# Altium PCB antenna-db(1).PcbDoc
Units mm, origin at the board's own origin, x right, y up, seen from the top; angles counter-clockwise.
Board outline 93.98 x 93.98 mm, 4 copper layers (F.Cu, In1.Cu, In2.Cu, B.Cu); 80 components, 74 nets, 250 pads, 206 vias.
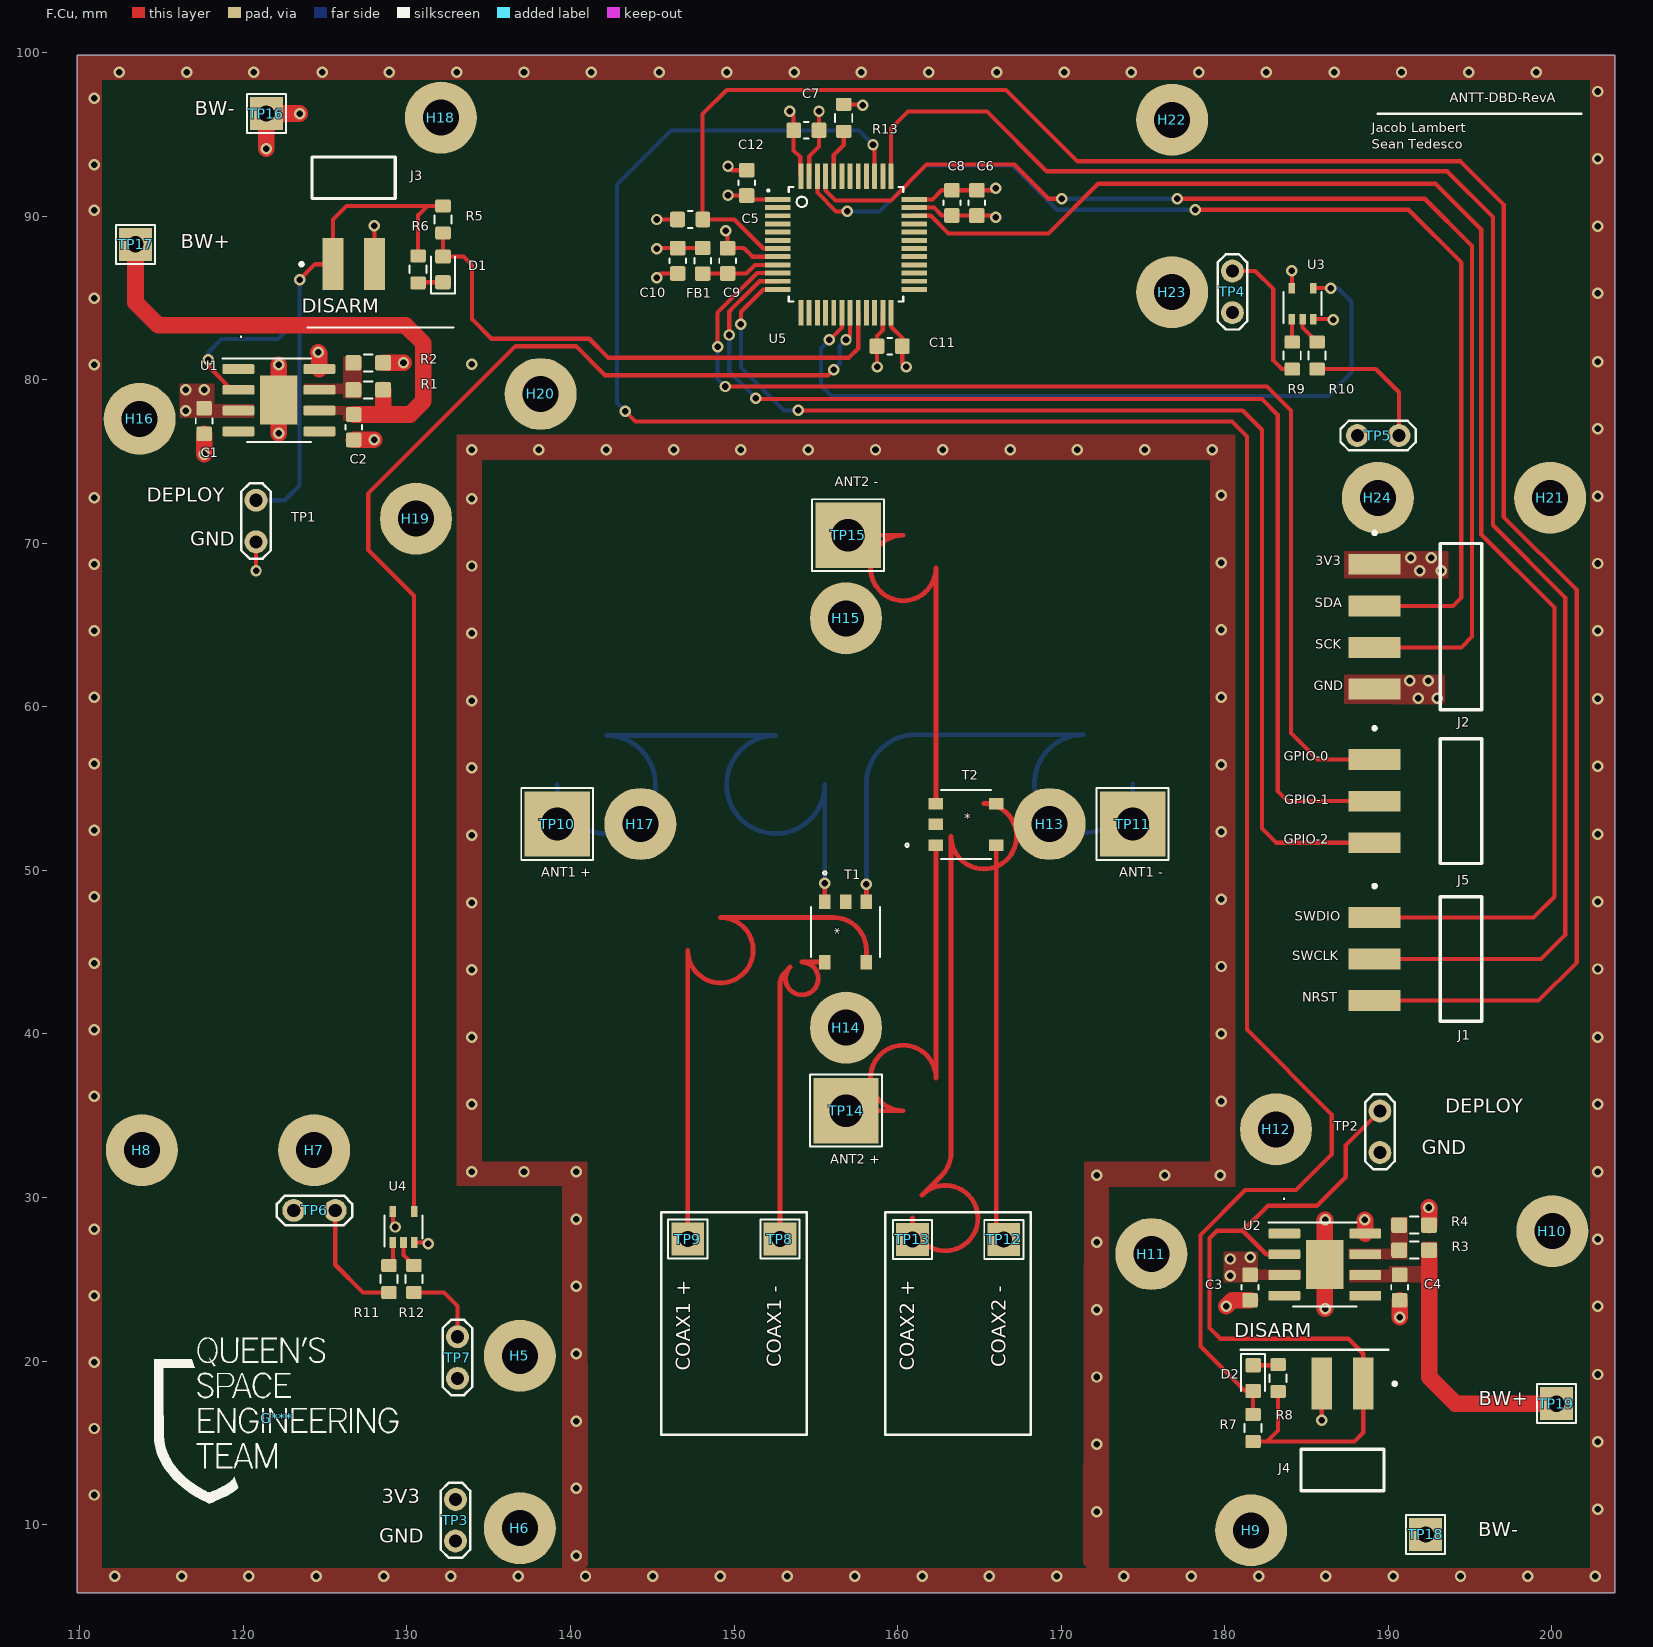
[diagram p0: F.Cu view]
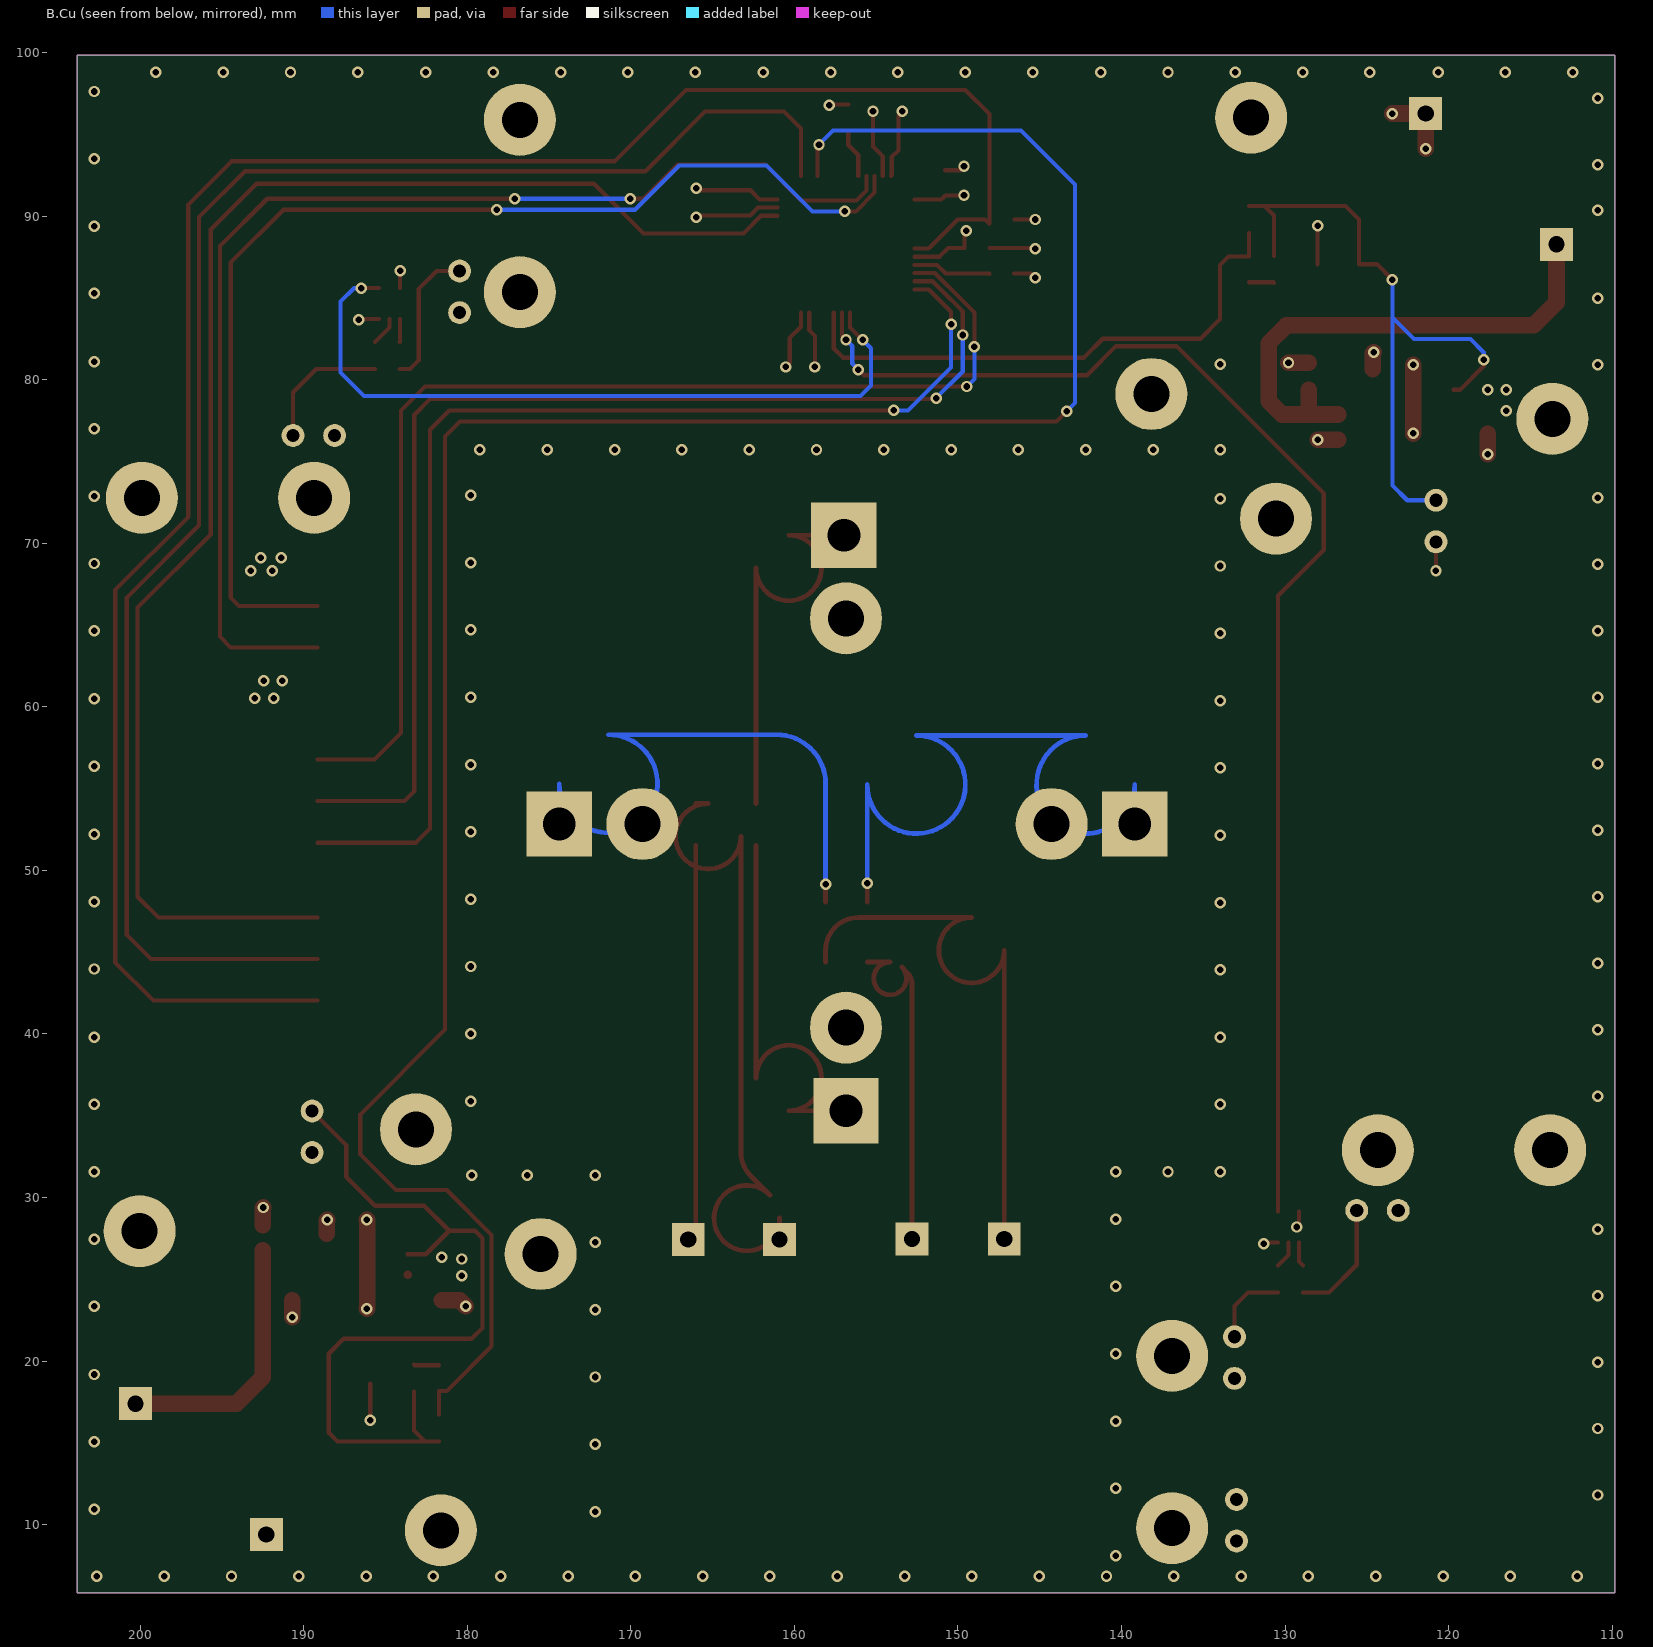
[diagram p1: B.Cu view, seen from below]
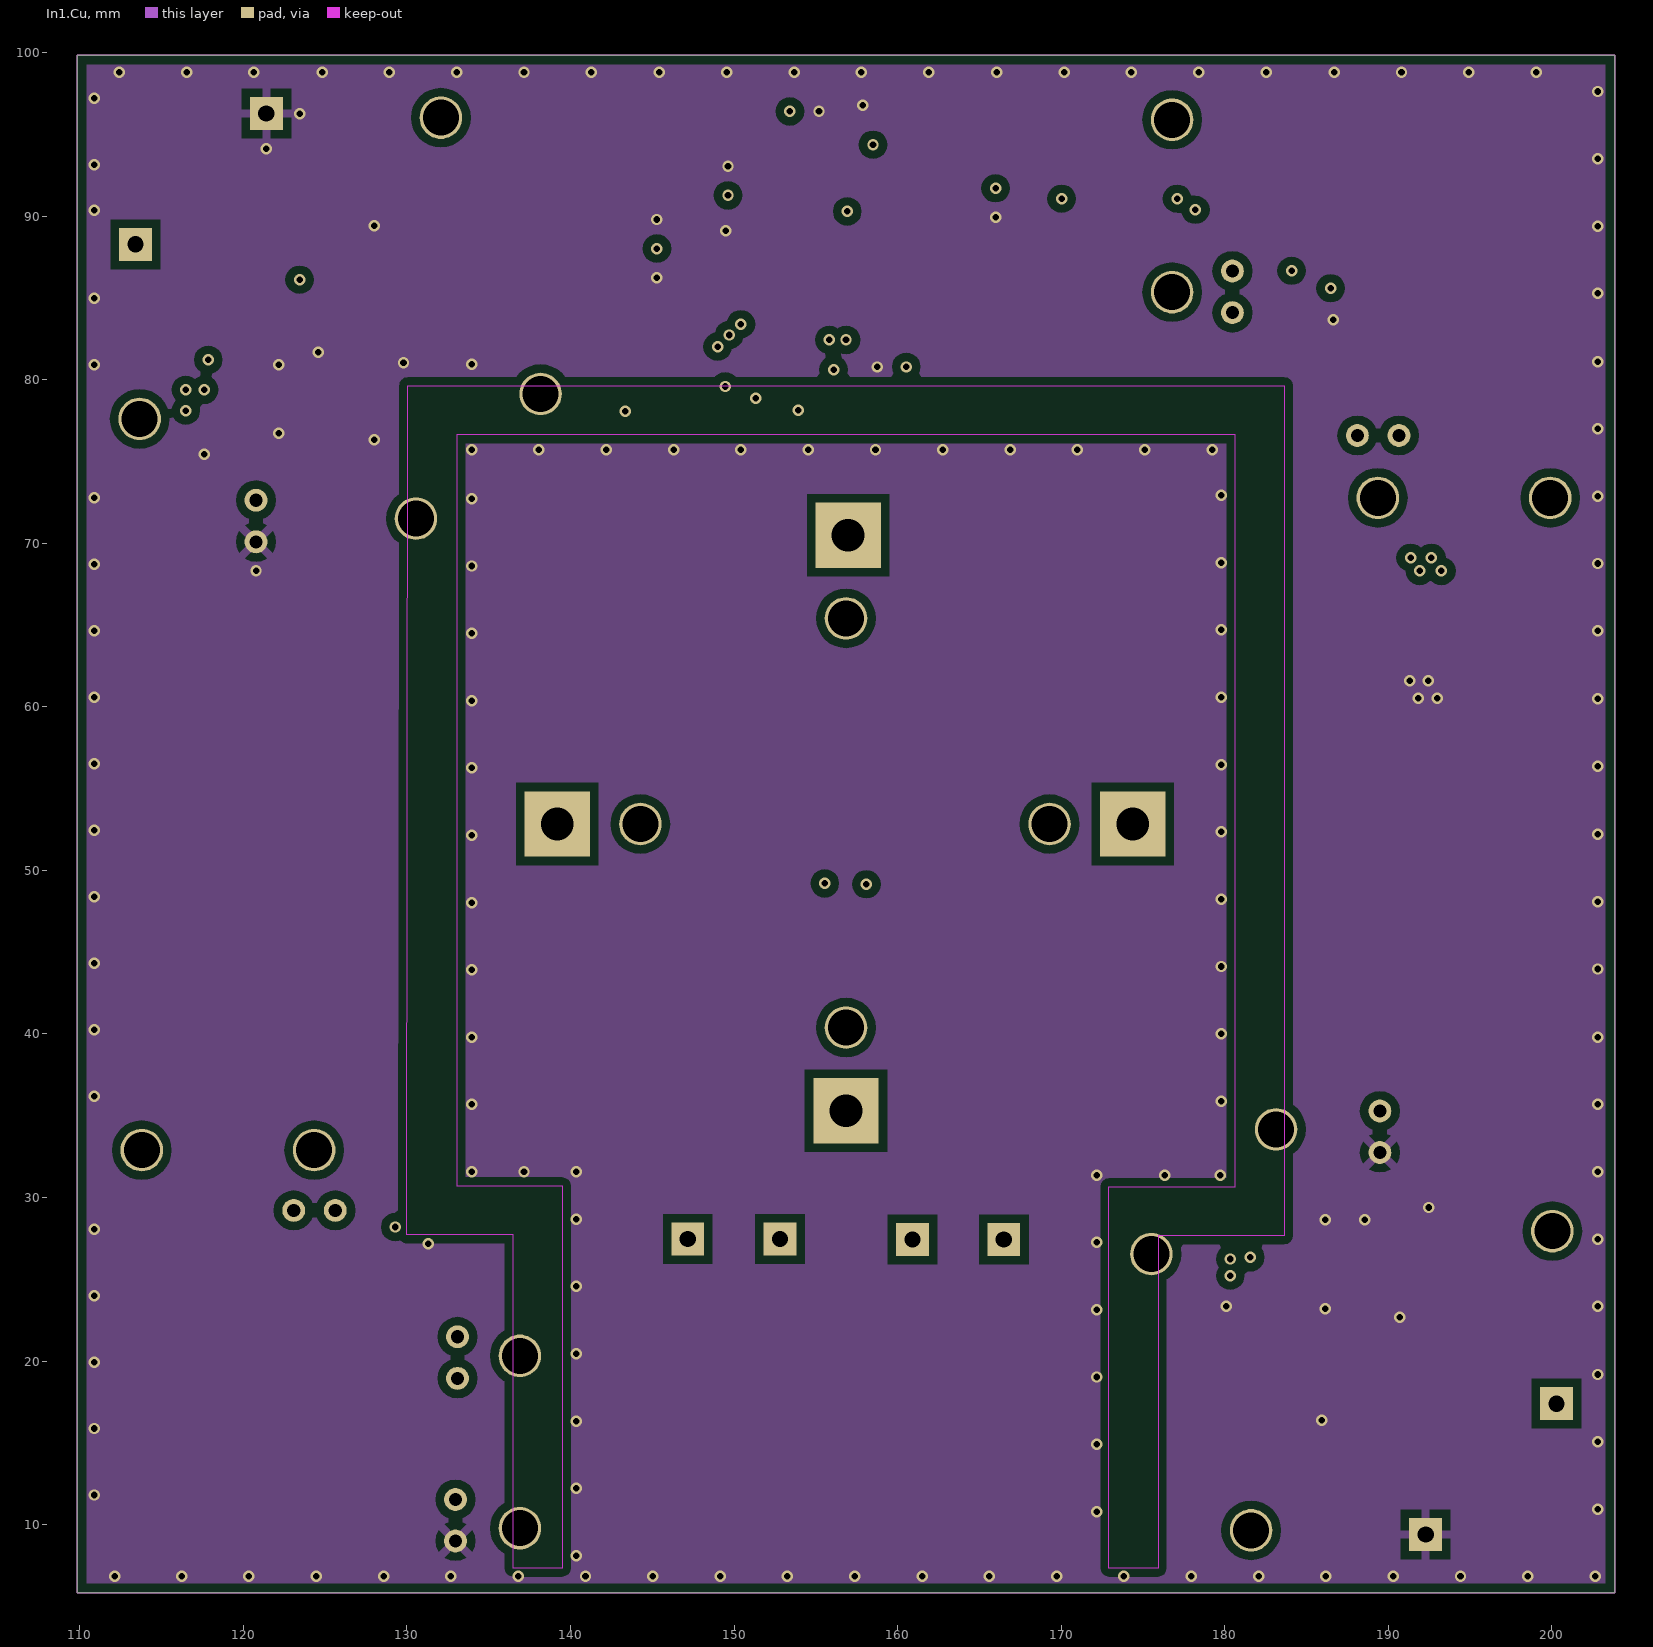
[diagram p2: In1.Cu]
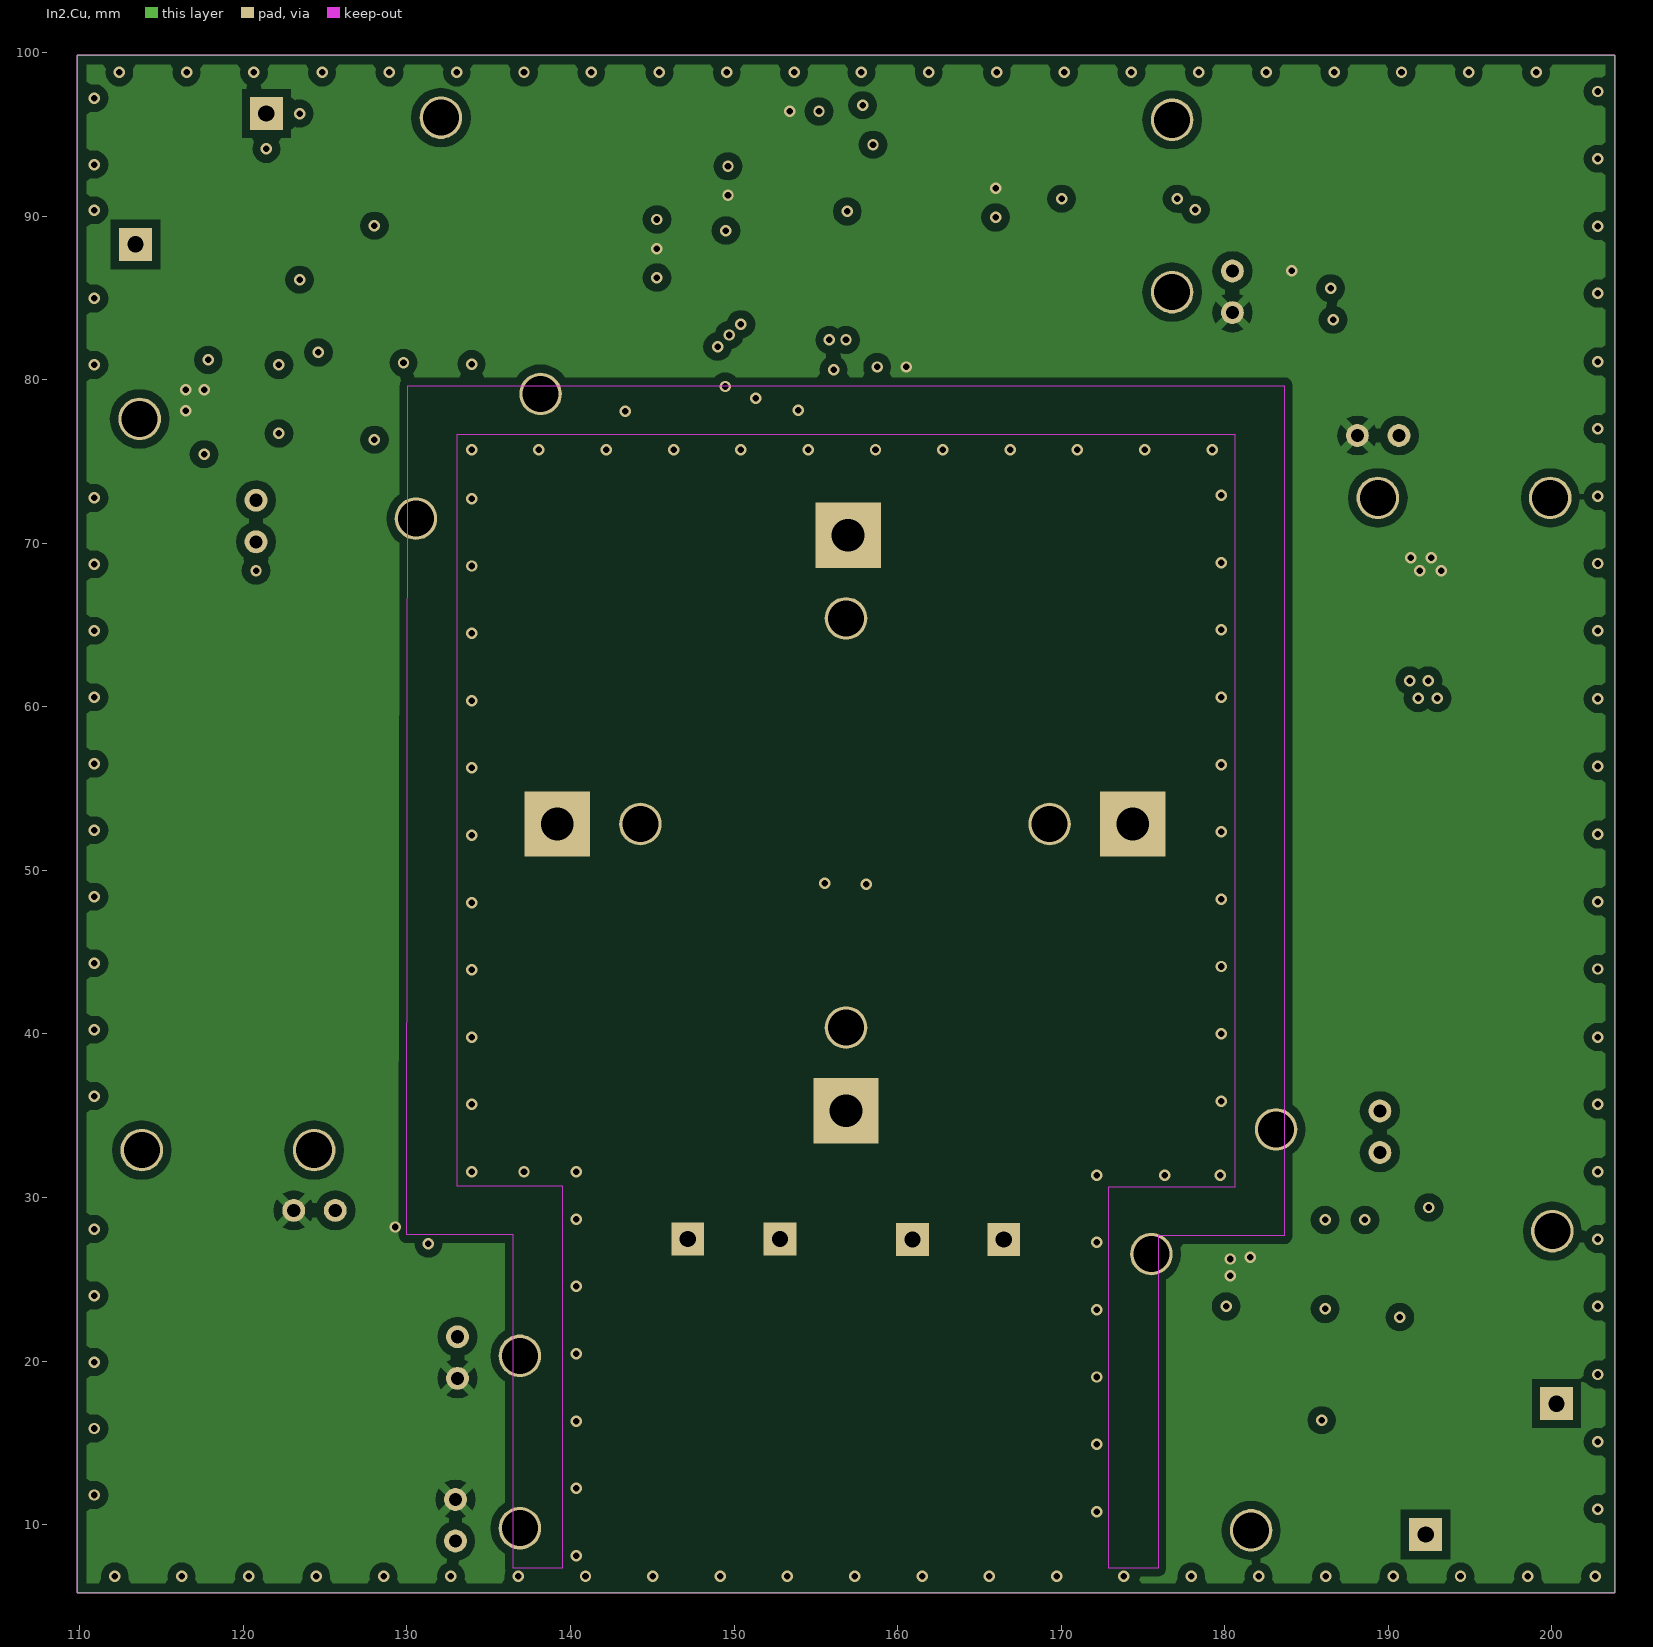
[diagram p3: In2.Cu]

## Layer stack, top to bottom
F.Mask: solder mask 0.0102, Solder Resist, Dk 3.5
F.Cu: signal copper 0.0356
Dielectric 1: dielectric 0.32, FR-4, Dk 4.8
In1.Cu: signal copper 0.0356
Dielectric2: dielectric 0.32, FR-4, Dk 4.8
In2.Cu: signal copper 0.0356
Dielectric3: dielectric 0.32, FR-4, Dk 4.8
B.Cu: signal copper 0.0356
B.Mask: solder mask 0.0102, Solder Resist, Dk 3.5

## Board outline
109.855,99.822 109.855,5.842 203.835,5.842 203.835,99.822 109.855,99.822

## Design rules (kind name [scope] priority, off if disabled: settings)
Clearance "Clearence 0.508_Polygon" [InNamedPolygon('In1.Cu-GND') OR InNamedPolygon('In2.Cu-+3V3')] p1: gap=0.508 ignorepadtopadclearanceinfootprint=FALSE
MinimumSolderMaskSliver [All] p1: minsoldermaskwidth=0
PolygonConnect Polygon_In2.Cu-+3V3_ConnectDirect [IsNamedPolygon('In2.Cu-+3V3') vs IsVia] p1: connectstyle=Direct reliefconductorwidth=0.254 reliefentries=4 polygonreliefangle="90 Angle" airgapwidth=0.254
PolygonConnect Polygon_In2.Cu-+3V3_ConnectRelief45 [IsNamedPolygon('In2.Cu-+3V3') vs (IsThruPin or IsSMTPin) and (PadShape_AllLayers = 'Round')] p2: connectstyle=Relief reliefconductorwidth=0.508 reliefentries=4 polygonreliefangle="45 Angle" airgapwidth=0.508
PolygonConnect Polygon_In2.Cu-+3V3_ConnectRelief90 [IsNamedPolygon('In2.Cu-+3V3') vs (IsThruPin or IsSMTPin) and (PadShape_AllLayers <> 'Round')] p3: connectstyle=Relief reliefconductorwidth=0.508 reliefentries=4 polygonreliefangle="90 Angle" airgapwidth=0.508
PolygonConnect Polygon_In1.Cu-GND_ConnectDirect [IsNamedPolygon('In1.Cu-GND') vs IsVia] p4: connectstyle=Direct reliefconductorwidth=0.254 reliefentries=4 polygonreliefangle="90 Angle" airgapwidth=0.254
PolygonConnect Polygon_In1.Cu-GND_ConnectRelief45 [IsNamedPolygon('In1.Cu-GND') vs (IsThruPin or IsSMTPin) and (PadShape_AllLayers = 'Round')] p5: connectstyle=Relief reliefconductorwidth=0.508 reliefentries=4 polygonreliefangle="45 Angle" airgapwidth=0.508
PolygonConnect Polygon_In1.Cu-GND_ConnectRelief90 [IsNamedPolygon('In1.Cu-GND') vs (IsThruPin or IsSMTPin) and (PadShape_AllLayers <> 'Round')] p6: connectstyle=Relief reliefconductorwidth=0.508 reliefentries=4 polygonreliefangle="90 Angle" airgapwidth=0.508
PolygonConnect Polygon_F.Cu-+3V3-2_ConnectDirect [IsNamedPolygon('F.Cu-+3V3-2')] p7: connectstyle=Direct reliefconductorwidth=0.254 reliefentries=4 polygonreliefangle="90 Angle" airgapwidth=0.254
PolygonConnect Polygon_F.Cu-Net-(C4-Pad2)_ConnectDirect [IsNamedPolygon('F.Cu-Net-(C4-Pad2)')] p8: connectstyle=Direct reliefconductorwidth=0.254 reliefentries=4 polygonreliefangle="90 Angle" airgapwidth=0.254
PolygonConnect Polygon_F.Cu-+3V3-1_ConnectDirect [IsNamedPolygon('F.Cu-+3V3-1')] p9: connectstyle=Direct reliefconductorwidth=0.254 reliefentries=4 polygonreliefangle="90 Angle" airgapwidth=0.254
PolygonConnect Polygon_F.Cu-GND-3_ConnectDirect [IsNamedPolygon('F.Cu-GND-3')] p10: connectstyle=Direct reliefconductorwidth=0.254 reliefentries=4 polygonreliefangle="90 Angle" airgapwidth=0.254
PolygonConnect Polygon_F.Cu-GND-2_ConnectDirect [IsNamedPolygon('F.Cu-GND-2')] p11: connectstyle=Direct reliefconductorwidth=0.254 reliefentries=4 polygonreliefangle="90 Angle" airgapwidth=0.254
PolygonConnect Polygon_F.Cu-+3V3_ConnectDirect [IsNamedPolygon('F.Cu-+3V3')] p12: connectstyle=Direct reliefconductorwidth=0.254 reliefentries=4 polygonreliefangle="90 Angle" airgapwidth=0.254
PolygonConnect Polygon_F.Cu-Net-(R1-Pad2)_ConnectDirect [IsNamedPolygon('F.Cu-Net-(R1-Pad2)')] p13: connectstyle=Direct reliefconductorwidth=0.254 reliefentries=4 polygonreliefangle="90 Angle" airgapwidth=0.254
PolygonConnect Polygon_F.Cu-Net-(R3-Pad2)_ConnectDirect [IsNamedPolygon('F.Cu-Net-(R3-Pad2)')] p14: connectstyle=Direct reliefconductorwidth=0.254 reliefentries=4 polygonreliefangle="90 Angle" airgapwidth=0.254
PolygonConnect Polygon_F.Cu-Net-(C2-Pad2)_ConnectDirect [IsNamedPolygon('F.Cu-Net-(C2-Pad2)')] p15: connectstyle=Direct reliefconductorwidth=0.254 reliefentries=4 polygonreliefangle="90 Angle" airgapwidth=0.254
PolygonConnect Polygon_F.Cu-GND-1_ConnectDirect [IsNamedPolygon('F.Cu-GND-1')] p16: connectstyle=Direct reliefconductorwidth=0.254 reliefentries=4 polygonreliefangle="90 Angle" airgapwidth=0.254
PolygonConnect Polygon_F.Cu-GND_ConnectDirect [IsNamedPolygon('F.Cu-GND')] p17: connectstyle=Direct reliefconductorwidth=0.254 reliefentries=4 polygonreliefangle="90 Angle" airgapwidth=0.254
RoutingVias [All] p1: holewidth=0.711 width=1.27 viastyle="Through Hole" minholewidth=0.711 minwidth=1.27 maxholewidth=0.711 maxwidth=1.27
SilkToSilkClearance [All] p1: silktosilkclearance=0
SilkToSolderMaskClearance [IsPad] p1: minsilkscreentomaskgap=0 clearancetoexposedcopper=TRUE
SolderMaskExpansion [All] p1: expansion=0.102 istentingtop=FALSE
Width [All] p1: maxlimit=10 minlimit=0.254 preferedwidth=0.254 minimp=50.000000 maximp=50.000000 favimp=50.000000
27 further rules are at their usual default settings.

## Components (designator, comment, footprint, x,y, rotation, side; value= is the part's Value field where it differs from the comment)
C1 "0.1u" C_0603_1608Metric 117.602,77.47 r90 top
C2 "0.1u" C_0603_1608Metric 126.746,77.089 r90 top
C3 "0.1u" C_0603_1608Metric 181.545,24.499 r90 top
C4 "0.1u" C_0603_1608Metric 190.689,24.499 r90 top
C5 "100u" C_0603_1608Metric 147.32,89.789 r180 top
C6 "10u" C_0603_1608Metric 164.846,90.805 r270 top
C7 "100n" C_0603_1608Metric 154.419,95.237 r0 top
C8 "100n" C_0603_1608Metric 163.322,90.805 r270 top
C9 "100n" C_0603_1608Metric 149.606,87.262 r90 top
C10 "10u" C_0603_1608Metric 146.558,87.262 r270 top
C11 "100n" C_0603_1608Metric 159.512,82.042 r180 top
C12 "100n" C_0603_1608Metric 150.774,92.024 r90 top
D1 "YLW" LED_0603_1608Metric 132.207,86.741 r90 top
D2 "YLW" LED_0603_1608Metric 181.737,18.955 r270 top
FB1 "100R @ 100M" L_0603_1608Metric 148.082,87.262 r90 top
G*** "LOGO" LOGO 122.047,16.51 r0 top
H5 "2.1mm" MountingHole_2.2mm_M2_Pad_TopBottom 136.906,20.32 r0 top
H6 "2.1mm" MountingHole_2.2mm_M2_Pad_TopBottom 136.906,9.779 r0 top
H7 "2.1mm" MountingHole_2.2mm_M2_Pad_TopBottom 124.333,32.893 r0 top
H8 "2.1mm" MountingHole_2.2mm_M2_Pad_TopBottom 113.792,32.893 r0 top
H9 "2.1mm" MountingHole_2.2mm_M2_Pad_TopBottom 181.61,9.652 r0 top
H10 "2.1mm" MountingHole_2.2mm_M2_Pad_TopBottom 200.025,27.94 r0 top
H11 "2.1mm" MountingHole_2.2mm_M2_Pad_TopBottom 175.514,26.543 r0 top
H12 "2.1mm" MountingHole_2.2mm_M2_Pad_TopBottom 183.134,34.163 r0 top
H13 "2.1mm" MountingHole_2.2mm_M2_Pad_TopBottom 169.291,52.832 r0 top
H14 "2.1mm" MountingHole_2.2mm_M2_Pad_TopBottom 156.845,40.386 r0 top
H15 "2.1mm" MountingHole_2.2mm_M2_Pad_TopBottom 156.845,65.405 r0 top
H16 "2.1mm" MountingHole_2.2mm_M2_Pad_TopBottom 113.665,77.597 r0 top
H17 "2.1mm" MountingHole_2.2mm_M2_Pad_TopBottom 144.272,52.832 r0 top
H18 "2.1mm" MountingHole_2.2mm_M2_Pad_TopBottom 132.08,96.012 r0 top
H19 "2.1mm" MountingHole_2.2mm_M2_Pad_TopBottom 130.556,71.501 r0 top
H20 "2.1mm" MountingHole_2.2mm_M2_Pad_TopBottom 138.176,79.121 r0 top
H21 "2.1mm" MountingHole_2.2mm_M2_Pad_TopBottom 199.898,72.771 r0 top
H22 "2.1mm" MountingHole_2.2mm_M2_Pad_TopBottom 176.784,95.885 r0 top
H23 "2.1mm" MountingHole_2.2mm_M2_Pad_TopBottom 176.784,85.344 r0 top
H24 "2.1mm" MountingHole_2.2mm_M2_Pad_TopBottom 189.357,72.771 r0 top
J1 "Conn_01x03" SAMTEC_TSM-103-01-L-SH 194.437,44.577 r270 top
J2 "Conn_01x04" SAMTEC_TSM-104-01-L-SH 194.437,64.897 r270 top
J3 "Conn_01x02_Male" SAMTEC_TSM-102-01-L-SH 126.746,92.336 r0 top
J4 "Conn_01x02_Male" SAMTEC_TSM-102-01-L-SH 187.198,13.335 r180 top
J5 "Conn_01x03" SAMTEC_TSM-103-01-L-SH 194.437,54.229 r270 top
R1 "DNP" R_0603_1608Metric_Pad0.98x0.95mm_HandSolder 127.635,79.375 r180 top
R2 "0" R_0603_1608Metric_Pad0.98x0.95mm_HandSolder 127.635,81.026 r0 top
R3 "DNP" R_0603_1608Metric_Pad0.98x0.95mm_HandSolder 191.578,26.785 r180 top
R4 "0" R_0603_1608Metric_Pad0.98x0.95mm_HandSolder 191.578,28.309 r0 top
R5 "100k" R_0603_1608Metric 132.207,89.789 r90 top
R6 "2k2" R_0603_1608Metric 130.683,86.741 r90 top
R7 "100k" R_0603_1608Metric 181.737,15.907 r270 top
R8 "2k2" R_0603_1608Metric 183.261,18.955 r270 top
R9 "0" R_0603_1608Metric 184.125,81.471 r90 top
R10 "0" R_0603_1608Metric 185.649,81.471 r90 top
R11 "0" R_0603_1608Metric 128.905,25.019 r90 top
R12 "0" R_0603_1608Metric 130.429,25.019 r90 top
R13 "10k" R_0603_1608Metric 156.705,95.999 r90 top
T1 "MABA-007159-000000" MABA-007159-000000 156.82,46.228 r270 top
T2 "MABA-007159-000000" MABA-007159-000000 164.186,52.807 r0 top
TP1 "Manual Enable - 144 Deployment" TestPoint_2Pads_Pitch2.54mm_Drill0.8mm 120.777,72.624 r270 top
TP2 "Manual Enable - 434 Deployment" TestPoint_2Pads_Pitch2.54mm_Drill0.8mm 189.484,35.286 r270 top
TP3 "Power Sensing" TestPoint_2Pads_Pitch2.54mm_Drill0.8mm 132.969,11.537 r270 top
TP4 "TestPoint_2Pole" TestPoint_2Pads_Pitch2.54mm_Drill0.8mm 180.467,84.094 r90 top
TP5 "TestPoint_2Pole" TestPoint_2Pads_Pitch2.54mm_Drill0.8mm 188.107,76.581 r0 top
TP6 "TestPoint_2Pole" TestPoint_2Pads_Pitch2.54mm_Drill0.8mm 123.083,29.21 r0 top
TP7 "TestPoint_2Pole" TestPoint_2Pads_Pitch2.54mm_Drill0.8mm 133.096,18.943 r90 top
TP8 "144 Coax Pin Connection" TestPoint_THTPad_2.0x2.0mm_Drill1.0mm 152.806,27.457 r0 top
TP9 "144 Coax Sleeve Connection" TestPoint_THTPad_2.0x2.0mm_Drill1.0mm 147.168,27.457 r0 top
TP10 "ANT1 +" TestPoint_THTPad_4.0x4.0mm_Drill2.0mm 139.192,52.832 r0 top
TP11 "ANT1 -" TestPoint_THTPad_4.0x4.0mm_Drill2.0mm 174.371,52.832 r0 top
TP12 "434 Coax Pin Connection" TestPoint_THTPad_2.0x2.0mm_Drill1.0mm 166.497,27.432 r0 top
TP13 "434 Coax Sleeve Connection" TestPoint_THTPad_2.0x2.0mm_Drill1.0mm 160.909,27.432 r0 top
TP14 "ANT2 +" TestPoint_THTPad_4.0x4.0mm_Drill2.0mm 156.845,35.306 r0 top
TP15 "ANT2 -" TestPoint_THTPad_4.0x4.0mm_Drill2.0mm 156.972,70.485 r0 top
TP16 "144 Burn Wire -" TestPoint_THTPad_2.0x2.0mm_Drill1.0mm 121.412,96.266 r0 top
TP17 "144 Burn Wire +" TestPoint_THTPad_2.0x2.0mm_Drill1.0mm 113.411,88.265 r0 top
TP18 "434 Burn Wire -" TestPoint_THTPad_2.0x2.0mm_Drill1.0mm 192.278,9.398 r0 top
TP19 "434 Burn Wire +" TestPoint_THTPad_2.0x2.0mm_Drill1.0mm 200.279,17.399 r0 top
U1 "SC4216HSETRT" SOIC-8-1EP_3.9x4.9mm_P1.27mm_EP2.29x3mm#1 122.174,78.74 r0 top
U2 "SC4216HSETRT" SOIC-8-1EP_3.9x4.9mm_P1.27mm_EP2.29x3mm#2 186.117,25.896 r0 top
U3 "74AHC1G08" SOT-353_SC-70-5 184.76,84.646 r90 top
U4 "74AHC1G08" SOT-353_SC-70-5 129.794,28.194 r90 top
U5 "STM32F030CCT6" QFP50P900X900X160-48N 156.845,88.265 r0 top

## Footprints (in the part's own frame and the unit in brackets; to place one, negate y for a bottom-side part, rotate by r counter-clockwise, add the part's x,y. Pads: shape width x height; smd on the part's side, far side on the other; paste and mask are expansions set on the pad)
C_0603_1608Metric [mm]
  rrect25% 0.9x0.95 smd mask+0: 1(-0.775,0) 2(0.775,0)
  silkscreen extent -0.14,-0.51 0.14,0.51
L_0603_1608Metric [mm]
  rrect25% 0.875x0.95 smd mask+0: 1(-0.787,0) 2(0.787,0)
  silkscreen extent -0.16,-0.51 0.16,0.51
LED_0603_1608Metric [mm]
  rrect25% 0.875x0.95 smd mask+0: 1(-0.787,0) 2(0.787,0)
  silkscreen extent -1.49,-0.73 0.8,0.73
LOGO [mm]
  silkscreen extent -7.5,-5.22 7.42,4.93
MABA-007159-000000 [mil]
  rect 35x28 smd mask+0: 1(-72.5,-50) 2(-72.5,0) 3(-72.5,50) 4(72.5,50) 5(72.5,-50)
  silkscreen extent -146,-83 60,83
MountingHole_2.2mm_M2_Pad_TopBottom [mm]
  round 4.4 smd paste-4.4 mask+0: 1(0,0)
  round 4.4 smd far side paste-4.4 mask+0: 1(0,0)
  round 2.6 hole 2.2 paste-2539.97 mask+0: 1(0,0)
QFP50P900X900X160-48N [mm]
  rrect11% 1.56x0.3 smd mask+0: 1(-4.18,2.75) 2(-4.18,2.25) 3(-4.18,1.75) 4(-4.18,1.25) 5(-4.18,0.75) 6(-4.18,0.25) 7(-4.18,-0.25) 8(-4.18,-0.75) 9(-4.18,-1.25) 10(-4.18,-1.75) 11(-4.18,-2.25) 12(-4.18,-2.75) 25(4.18,-2.75) 26(4.18,-2.25) 27(4.18,-1.75) 28(4.18,-1.25) 29(4.18,-0.75) 30(4.18,-0.25) 31(4.18,0.25) 32(4.18,0.75) 33(4.18,1.25) 34(4.18,1.75) 35(4.18,2.25) 36(4.18,2.75)
  rrect11% 0.3x1.56 smd mask+0: 13(-2.75,-4.18) 14(-2.25,-4.18) 15(-1.75,-4.18) 16(-1.25,-4.18) 17(-0.75,-4.18) 18(-0.25,-4.18) 19(0.25,-4.18) 20(0.75,-4.18) 21(1.25,-4.18) 22(1.75,-4.18) 23(2.25,-4.18) 24(2.75,-4.18) 37(2.75,4.18) 38(2.25,4.18) 39(1.75,4.18) 40(1.25,4.18) 41(0.75,4.18) 42(0.25,4.18) 43(-0.25,4.18) 44(-0.75,4.18) 45(-1.25,4.18) 46(-1.75,4.18) 47(-2.25,4.18) 48(-2.75,4.18)
  silkscreen extent -4.81,-3.5 3.5,3.5
R_0603_1608Metric [mm]
  rrect25% 0.8x0.95 smd mask+0: 1(-0.825,0) 2(0.825,0)
  silkscreen extent -0.24,-0.52 0.24,0.52
R_0603_1608Metric_Pad0.98x0.95mm_HandSolder [mm]
  rrect25% 0.975x0.95 smd mask+0: 1(-0.913,0) 2(0.913,0)
  silkscreen extent -0.25,-0.52 0.25,0.52
SAMTEC_TSM-102-01-L-SH [mm]
  rect 1.27x3.18 smd mask+0: 1(-1.27,-5.28) 2(1.27,-5.28)
  silkscreen extent -3.29,-5.38 2.54,1.27
SAMTEC_TSM-103-01-L-SH [mm]
  rect 1.27x3.18 smd mask+0: 1(-2.54,-5.28) 2(0,-5.28) 3(2.54,-5.28)
  silkscreen extent -4.56,-5.38 3.81,1.27
SAMTEC_TSM-104-01-L-SH [mm]
  rect 1.27x3.18 smd mask+0: 1(-3.81,-5.28) 2(-1.27,-5.28) 3(1.27,-5.28) 4(3.81,-5.28)
  silkscreen extent -5.83,-5.38 5.08,1.27
SOIC-8-1EP_3.9x4.9mm_P1.27mm_EP2.29x3mm#1 [mm]
  rrect25% 1.95x0.6 smd mask+0: 1(-2.475,1.905) 2(-2.475,0.635) 3(-2.475,-0.635) 4(-2.475,-1.905) 5(2.475,-1.905) 6(2.475,-0.635) 7(2.475,0.635) 8(2.475,1.905)
  rect 2.29x3 smd paste-3 mask+0: 9(0,0)
  rrect25% 0.92x1.21 on Top Paste mask-1.21: Un1(-0.57,-0.75) Un2(0.57,-0.75) Un3(0.57,0.75) Un4(-0.57,0.75)
  silkscreen extent -3.45,-2.56 1.95,2.56
SOIC-8-1EP_3.9x4.9mm_P1.27mm_EP2.29x3mm#2 [mm]
  rrect25% 1.95x0.6 smd mask+0: 1(-2.475,1.905) 2(-2.475,0.635) 3(-2.475,-0.635) 4(-2.475,-1.905) 5(2.475,-1.905) 6(2.475,-0.635) 7(2.475,0.635) 8(2.475,1.905)
  rect 2.29x3 smd paste-3 mask+0: 9(0,0)
  rrect25% 0.92x1.21 on Top Paste mask-1.21: Un1(0.57,-0.75) Un2(-0.57,0.75) Un3(-0.57,-0.75) Un4(0.57,0.75)
  silkscreen extent -3.45,-2.56 1.95,2.56
SOT-353_SC-70-5 [mm]
  rect 0.65x0.4 smd mask+0: 1(-0.95,0.65) 2(-0.95,0) 3(-0.95,-0.65) 4(0.95,-0.65) 5(0.95,0.65)
  silkscreen extent -1.2,-1.16 0.7,1.16
TestPoint_2Pads_Pitch2.54mm_Drill0.8mm [mm]
  round 1.4 hole 0.8 paste-2539.97 mask+0: 1(0,0) 2(2.54,0)
  silkscreen extent -1.03,-0.9 3.57,0.9
TestPoint_THTPad_2.0x2.0mm_Drill1.0mm [mm]
  rect 2x2 hole 1 paste-2539.97 mask+0: 1(0,0)
  silkscreen extent -1.2,-1.2 1.2,1.2
TestPoint_THTPad_4.0x4.0mm_Drill2.0mm [mm]
  rect 4x4 hole 2 paste-2539.97 mask+0: 1(0,0)
  silkscreen extent -2.2,-2.2 2.2,2.2

## Part data
C1 C2 C3 C4 C5 C6 C7 C8 C9 C10 C11 C12: library part C_0603_1608Metric, "Capacitor SMD 0603 (1608 Metric), square (rectangular) end terminal, IPC_7351 nominal, (Body size source: IPC-SM-782 page 76, https://www.pcb-3d.com/wordpress/wp-content/uploads/ipc-sm-782a_amendment_1_and_2.pdf), generated with kicad-footprint-generator", Sheetfile=antenna-db.kicad_sch
D1 D2: library part LED_0603_1608Metric, "LED SMD 0603 (1608 Metric), square (rectangular) end terminal, IPC_7351 nominal, (Body size source: http://www.tortai-tech.com/upload/download/2011102023233369053.pdf), generated with kicad-footprint-generator", Sheetfile=antenna-db.kicad_sch
FB1: library part L_0603_1608Metric, "Inductor SMD 0603 (1608 Metric), square (rectangular) end terminal, IPC_7351 nominal, (Body size source: http://www.tortai-tech.com/upload/download/2011102023233369053.pdf), generated with kicad-footprint-generator", Sheetfile=antenna-db.kicad_sch
H5 H6 H7 H8 H9 H10 H11 H12 H13 H14 H15 H16 H17 H18 H19 H20 H21 H22 H23 H24: library part MountingHole_2.2mm_M2_Pad_TopBottom, "Mounting Hole 2.2mm, M2", Sheetfile=mounting_holes.kicad_sch, Sheetname="M2 Mounting Holes"
J1 J5: library part SAMTEC_TSM-103-01-L-SH, Sheetfile=antenna-db.kicad_sch
J2: library part SAMTEC_TSM-104-01-L-SH, Sheetfile=antenna-db.kicad_sch
J3 J4: library part SAMTEC_TSM-102-01-L-SH, Sheetfile=antenna-db.kicad_sch
R1 R2 R3 R4: library part R_0603_1608Metric_Pad0.98x0.95mm_HandSolder, "Resistor SMD 0603 (1608 Metric), square (rectangular) end terminal, IPC_7351 nominal with elongated pad for handsoldering. (Body size source: IPC-SM-782 page 72, https://www.pcb-3d.com/wordpress/wp-content/uploads/ipc-sm-782a_amendment_1_and_2.pdf), generated with kicad-footprint-generator", Sheetfile=antenna-db.kicad_sch
R5 R6 R7 R8 R9 R10 R11 R12 R13: library part R_0603_1608Metric, "Resistor SMD 0603 (1608 Metric), square (rectangular) end terminal, IPC_7351 nominal, (Body size source: IPC-SM-782 page 72, https://www.pcb-3d.com/wordpress/wp-content/uploads/ipc-sm-782a_amendment_1_and_2.pdf), generated with kicad-footprint-generator", Sheetfile=antenna-db.kicad_sch
T1 T2: MANUFACTURER="M/A-Com Technology Solutions", Category="RF/IF and RFID", DK_Datasheet_Link=http://cdn.macom.com/datasheets/MABA-007159-000000.pdf, DK_Detail_Page=/product-detail/en/m-a-com-technology-solutions/MABA-007159-000000/1465-1302-1-ND/4429999, Description="BALUN 4.5MHZ-3GHZ 1:1 6SMD FLAT", Digi-Key_PN=1465-1302-1-ND, Family=Balun, MPN=MABA-007159-000000, Sheetfile=antenna-db.kicad_sch, Status=Active
TP1 TP2 TP3 TP4 TP5 TP6 TP7: library part TestPoint_2Pads_Pitch2.54mm_Drill0.8mm, "Test point with 2 pins, pitch 2.54mm, drill diameter 0.8mm", Sheetfile=antenna-db.kicad_sch
TP8 TP9 TP12 TP13 TP16 TP17 TP18 TP19: library part TestPoint_THTPad_2.0x2.0mm_Drill1.0mm, "THT rectangular pad as test Point, square 2.0mm_Drill1.0mm  side length, hole diameter 1.0mm", Sheetfile=antenna-db.kicad_sch
TP10 TP11 TP14 TP15: library part TestPoint_THTPad_4.0x4.0mm_Drill2.0mm, "THT rectangular pad as test Point, square 4.0mm  side length, hole diameter 2.0mm", Sheetfile=antenna-db.kicad_sch
U1 U2: library part SOIC-8-1EP_3.9x4.9mm_P1.27mm_EP2.29x3mm, "SOIC, 8 Pin (https://www.analog.com/media/en/technical-documentation/data-sheets/ada4898-1_4898-2.pdf#page=29), generated with kicad-footprint-generator ipc_gullwing_generator.py", Sheetfile=antenna-db.kicad_sch
U3 U4: library part SOT-353_SC-70-5, "SOT-353, SC-70-5", Sheetfile=antenna-db.kicad_sch
U5: library part QFP50P900X900X160-48N, MANUFACTURER=STMicroelectronics, Sheetfile=antenna-db.kicad_sch

## Via types
v1: diameter 0.7, hole 0.4, F.Cu to B.Cu, tented both sides, 206 vias

## Nets (pads, with @x,y where several pads share a name; then routed paths per layer and width w, separated by ;. In a path a pad name is that pad's centre, name@x,y a point inside that pad or via, vN(x,y) a via of type N, cw(c..) or ccw(c..) an arc to the next point about the centre after c; other vN are vias at no path point)
+3.3VA: C9.1 FB1.1 U5.9 | length 4.8
  F.Cu w0.254: FB1.1 148.094,86.487 C9.1 150.749,86.487 151.277,87.015 U5.9
+3V3: C1.2 C3.2 C6.1 C7.1 C8.1 C10.1 C11.1 C12.1 FB1.2 J2.1 TP3.1 TP4.1 TP5.1 TP6.1 TP7.1 U1.3 U2.3 U3.5 U4.5 U5.1 U5.24 U5.36 U5.48 | length 21.1
  F.Cu w0.254: U4.5 129.144,28.336 v1(129.286,28.194) ; v1(145.288,88.011) 145.314,88.037 C10.1 146.57,88.049 FB1.2 ; v1(149.631,91.262) 149.644,91.249 C12.1 C12.1@150.932,91.091 ; C12.1@151.034,91.015 U5.1 ; v1(153.416,96.393) 153.644,96.165 C7.1 153.644,94.006 154.051,93.599 154.051,92.489 U5.48 ; U5.24 159.595,83.229 160.287,82.537 C11.1 160.287,81.013 v1(160.528,80.772) ; U5.36 162.135,91.015 162.7,91.58 C8.1 C6.1 165.875,91.58 v1(165.989,91.694) ; v1(184.087,86.652) 184.11,86.629 U3.5
  F.Cu w0.508: U2.3@183.629,25.274 U2.3
  other v1: 180.34,25.222 180.34,26.238 181.559,26.34 191.922,68.301 193.243,68.301 191.364,69.113 192.634,69.113 116.484,78.105 116.484,79.375 117.602,79.375
BOOT0: R13.1 U5.44 | length 3
  F.Cu w0.254: U5.44 156.095,93.738 156.705,94.348 R13.1
DPY_DTC_144_GPIO_3V3: U3.4 U5.18 | length 45.3
  F.Cu w0.254: v1(155.829,82.423) 156.595,83.189 U5.18 ; U3.4 186.463,85.596 v1(186.474,85.585)
  B.Cu w0.254: v1(155.829,82.423) 155.321,81.915 155.321,79.629 155.956,78.994 157.861,78.994 186.309,78.994 187.744,80.429 187.744,84.772 186.931,85.585 v1(186.474,85.585)
DPY_DTC_434_GPIO_3V3: U4.4 U5.19 | length 82
  F.Cu w0.254: U4.4 130.444,66.787 127.635,69.596 127.635,73.025 136.652,82.042 140.335,82.042 142.113,80.264 155.744,80.264 v1(156.083,80.603) ; v1(156.845,82.423) 157.095,82.673 U5.19
  B.Cu w0.254: v1(156.083,80.603) 156.464,80.984 156.464,82.042 v1(156.845,82.423)
GND: C1.1 C2.1 C3.1 C4.1 C5.2 C6.2 C7.2 C8.2 C9.2 C10.2 C11.2 C12.2 J2.4 J3.2 J4.2 R2.2 R4.2 R13.2 TP1.2 TP2.2 TP3.2 TP16.1 TP18.1 U1.8 U1.9 U2.8 U2.9 U3.3 U4.3 U5.8 U5.23 U5.35 U5.47 | length 54
  F.Cu w0.254: v1(120.777,68.326) TP1.2 ; J3.2 v1(128.016,89.408) ; U4.3 131.252,27.244 v1(131.318,27.178) ; v1(145.288,86.233) 145.542,86.487 C10.2 ; v1(145.288,89.789) C5.2 ; v1(149.504,89.112) 149.606,89.011 C9.2 150.596,88.037 151.118,87.515 U5.8 ; v1(149.631,93.04) 149.872,92.799 C12.2 ; U5.47 154.595,93.648 155.194,94.247 C7.2 v1(155.194,96.393) ; R13.2 157.811,96.824 v1(157.861,96.774) ; v1(158.75,80.772) 158.737,80.785 C11.2 158.737,82.664 159.095,83.022 U5.23 ; U5.35 162.215,90.515 162.7,90.03 C8.2 C6.2 165.875,90.03 v1(165.989,89.916) ; U3.3 186.585,83.696 v1(186.626,83.655) ; v1(185.928,16.383) J4.2
  F.Cu w1.016: v1(117.602,75.438) C1.1 ; v1(121.412,94.107) TP16.1 v1(123.444,96.266) ; v1(122.174,76.708) U1.9 v1(122.174,80.899) ; v1(124.587,81.661) 124.649,81.599 U1.8 ; C2.1 128.003,76.314 v1(128.016,76.327) ; R2.2 v1(129.794,81.026) ; v1(180.086,23.343) 180.467,23.724 C3.1 ; v1(186.131,23.19) 186.117,23.204 U2.9 186.117,28.612 v1(186.131,28.626) ; v1(188.57,28.626) 188.592,28.603 U2.8 ; C4.1 190.689,22.696 v1(190.703,22.682) ; v1(192.481,29.388) 192.49,29.379 R4.2
  other v1: 112.141,6.833 116.23,6.833 120.345,6.833 124.46,6.833 128.575,6.833 132.69,6.833 136.804,6.833 140.919,6.833 145.034,6.833 149.149,6.833 153.264,6.833 157.378,6.833 161.493,6.833 165.608,6.833 169.723,6.833 173.838,6.833 177.952,6.833 182.067,6.833 186.182,6.833 190.297,6.833 194.412,6.833 198.526,6.833 202.641,6.833 140.36,8.103 172.161,10.795 202.794,10.947 110.896,11.811 140.36,12.217 172.161,14.91 202.794,15.062 110.896,15.875 140.36,16.332 172.161,19.025 202.794,19.177 110.896,19.939 140.36,20.447 172.161,23.139 202.794,23.343 110.896,24.003 140.36,24.562 172.161,27.254 202.794,27.457 110.896,28.067 140.36,28.677 172.161,31.369 176.327,31.369 179.73,31.369 133.96,31.572 137.16,31.572 140.36,31.572 202.794,31.572 133.96,35.687 202.794,35.687 179.781,35.89 110.896,36.195 133.96,39.802 202.794,39.802 179.781,40.005 110.896,40.259 133.96,43.917 202.794,43.967 179.781,44.12 110.896,44.323 133.96,48.031 202.794,48.082 179.781,48.235 179.781,48.235 110.896,48.387 133.96,52.146 202.794,52.197 179.781,52.349 110.896,52.451 133.96,56.261 202.794,56.363 179.781,56.464 110.896,56.515 133.96,60.376 202.794,60.477 191.821,60.528 192.989,60.528 110.896,60.579 179.781,60.579 191.313,61.595 192.43,61.595 133.96,64.491 110.896,64.643 202.794,64.643 179.781,64.694 133.96,68.605 110.896,68.707 202.794,68.758 179.781,68.809 133.96,72.72 110.896,72.771 202.794,72.873 179.781,72.923 133.96,75.717 138.074,75.717 142.189,75.717 146.304,75.717 150.419,75.717 154.534,75.717 158.648,75.717 162.763,75.717 166.878,75.717 170.993,75.717 175.108,75.717 179.222,75.717 202.794,76.987 110.896,80.899 133.96,80.95 202.794,81.102 110.896,84.963 202.794,85.268 202.794,89.383 110.896,90.348 110.896,93.142 202.794,93.497 110.896,97.206 202.794,97.612 112.42,98.781 116.535,98.781 120.65,98.781 124.816,98.781 128.93,98.781 133.045,98.781 137.16,98.781 141.275,98.781 145.44,98.781 149.555,98.781 153.67,98.781 157.785,98.781 161.9,98.781 166.065,98.781 170.18,98.781 174.295,98.781 178.41,98.781 182.524,98.781 186.69,98.781 190.805,98.781 194.92,98.781 199.034,98.781
I2C1-SCK: J2.3 U5.45 | length 73.7
  F.Cu w0.254: U5.45 155.595,91.572 156.21,90.957 159.594,90.957 161.779,93.142 167.132,93.142 169.215,91.059 v1(170.028,91.059) ; v1(177.089,91.059) 192.227,91.059 195.123,88.163 195.123,64.287 194.462,63.627 J2.3
  B.Cu w0.254: v1(170.028,91.059) v1(177.089,91.059)
I2C1-SDA: J2.2 U5.46 | length 70.5
  F.Cu w0.254: U5.46 155.095,91.43 156.244,90.281 v1(156.921,90.281) ; v1(178.206,90.382) 191.227,90.382 194.462,87.147 194.462,66.675 193.954,66.167 J2.2
  B.Cu w0.254: v1(156.921,90.281) 158.886,90.281 161.696,93.091 167.038,93.091 169.747,90.382 v1@178.206,90.382
Net-(C2-Pad2): C2.2 R1.1 TP17.1 U1.6 | length 31.9
  F.Cu w1.016: TP17.1 113.411,84.709 114.808,83.312 129.921,83.312 131.01,82.223 131.01,78.686 130.188,77.864 128.638,77.864 ; C2.2 128.638,77.864 ; R1.1 128.548,77.954 128.638,77.864
Net-(C4-Pad2): C4.2 R3.1 TP19.1 U2.6 | length 16.2
  F.Cu w1.016: R3.1 192.49,19.015 194.107,17.399 TP19.1
Net-(D1-Pad1): D1.1 R6.1 | length 1.5
  F.Cu w0.254: R6.1 130.721,85.954 D1.1
Net-(D2-Pad1): D2.1 R8.1 | length 1.5
  F.Cu w0.254: D2.1 183.223,19.742 R8.1
Net-(R1-Pad2): R1.2 R2.1 U1.7
Net-(R3-Pad2): R3.2 R4.1 U2.7
Net-(R9-Pad1): R9.1 TP4.2 | length 8.7
  F.Cu w0.254: TP4.2 181.361,86.634 181.367,86.639 181.864,86.639 182.969,85.534 182.969,81.166 183.489,80.646 R9.1
Net-(R10-Pad1): R10.1 TP5.2 | length 8.2
  F.Cu w0.254: R10.1 189.229,80.646 190.647,79.228 TP5.2
Net-(R11-Pad1): R11.1 TP6.2 | length 7.3
  F.Cu w0.254: TP6.2 125.623,25.888 127.317,24.194 R11.1
Net-(R12-Pad1): R12.1 TP7.2 | length 4.9
  F.Cu w0.254: R12.1 132.27,24.194 133.096,23.368 TP7.2
Net-(T1-Pad1): T1.1 TP10.1 | length 48.2
  F.Cu w0.293: T1.1 v1(155.55,49.2)
  B.Cu w0.293: TP10.1 139.192,55.242 ccw(c142.192,55.242) 142.192,58.242 152.55,58.242 ccw(c152.55,55.242) 155.55,55.242 v1(155.55,49.2)
Net-(T1-Pad3): T1.3 TP11.1 | length 38.8
  F.Cu w0.293: T1.3 v1(158.09,49.149)
  B.Cu w0.293: v1(158.09,49.149) 158.09,55.293 cw(c161.09,55.293) 161.09,58.293 171.371,58.293 ccw(c171.371,55.293) 174.371,55.293 TP11.1
Net-(T1-Pad4): T1.4 TP9.1 | length 37.9
  F.Cu w0.293: TP9.1 147.168,45.117 ccw(c149.168,45.117) 149.168,47.117 156.09,47.117 cw(c156.09,45.117) 158.09,45.117 T1.4
Net-(T1-Pad5): T1.5 TP8.1 | length 23.8
  F.Cu w0.293: TP8.1 152.806,43.045 cw(c153.806,43.045) 153.099,43.752 153.441,44.094 ccw(c154.148,43.387) 154.148,44.386 T1.5
Net-(T2-Pad1): T2.1 TP14.1 | length 27.2
  F.Cu w0.293: TP14.1 160.344,35.306 cw(c160.344,37.306) 162.344,37.306 T2.1
Net-(T2-Pad3): T2.3 TP15.1 | length 27.2
  F.Cu w0.293: TP15.1 160.344,70.485 ccw(c160.344,68.485) 162.344,68.485 T2.3
Net-(T2-Pad4): T2.4 TP13.1 | length 45.1
  F.Cu w0.293: TP13.1 160.909,28.737 ccw(c162.909,28.737) 161.495,30.151 162.685,31.342 ccw(c161.271,32.756) 163.271,32.756 163.271,52.077 ccw(c165.271,52.077) 165.271,54.077 T2.4
Net-(T2-Pad5): T2.5 TP12.1 | length 24.3
  F.Cu w0.293: T2.5 166.027,27.902 TP12.1
Net-(U3-Pad1): R9.2 U3.1 | length 1.4
  F.Cu w0.254: U3.1 184.11,82.311 R9.2
Net-(U3-Pad2): R10.2 U3.2 | length 1.8
  F.Cu w0.254: U3.2 184.76,83.185 R10.2
Net-(U4-Pad1): R11.2 U4.1 | length 1.5
  F.Cu w0.254: R11.2 129.144,26.083 U4.1
Net-(U4-Pad2): R12.2 U4.2 | length 1.7
  F.Cu w0.254: U4.2 129.794,26.479 R12.2
NRST: C5.1 J1.3 U5.7 | length 126.1
  F.Cu w0.254: U5.7 151.786,88.015 150.012,89.789 148.349,89.789 148.095,89.535 148.082,89.548 148.082,96.241 149.555,97.714 166.624,97.714 170.993,93.345 194.412,93.345 197.053,90.703 197.053,71.603 201.524,67.132 201.524,44.374 199.187,42.037 J1.3
POWER_144_EN: J3.1 R5.2 R6.2 TP1.1 U1.2 | length 42.1
  F.Cu w0.254: v1(117.856,81.204) 117.856,80.838 119.319,79.375 U1.2 ; v1(123.444,86.106) 124.394,87.056 J3.1 125.476,89.789 126.301,90.614 R5.2 131.254,90.614 130.683,90.043 R6.2
  B.Cu w0.254: v1(117.856,81.204) 117.856,81.661 118.669,82.474 122.123,82.474 123.444,83.795 123.444,84.049 ; TP1.1 122.535,72.624 123.444,73.533 123.444,84.049 ; v1(123.444,86.106) 123.444,84.049
POWER_434_EN: J4.1 R7.2 R8.2 TP2.1 U2.2 | length 49.4
  F.Cu w0.254: R8.2 183.261,15.748 182.594,15.081 R7.2 187.928,15.081 188.468,15.621 J4.1 188.468,20.447 187.554,21.361 179.73,21.361 179.07,22.022 179.07,27.508 179.527,27.965 181.102,27.965 ; U2.2 182.536,26.531 181.102,27.965 ; TP2.1 187.401,33.203 187.401,31.267 185.623,29.489 182.626,29.489 181.102,27.965
PWR_EN_144_3V3_GPIO: D1.2 R5.1 U5.20 | length 33.7
  F.Cu w0.254: R5.1 D1.2 133.452,87.528 133.985,86.995 133.985,83.693 135.182,82.496 141.151,82.496 142.307,81.34 157.032,81.34 157.595,81.903 U5.20
PWR_EN_434_3V3_GPIO: D2.2 R7.1 U5.39 | length 140.7
  F.Cu w0.254: v1(143.358,78.054) 143.967,77.445 180.442,77.445 181.356,76.53 181.356,40.259 186.538,35.077 186.538,32.639 184.353,30.455 181.254,30.455 178.511,27.711 178.511,20.904 181.248,18.167 D2.2 R7.1 ; v1(158.496,94.361) 158.595,94.262 U5.39
  B.Cu w0.254: v1(143.358,78.054) 142.85,78.562 142.85,91.923 146.152,95.225 157.632,95.225 v1(158.496,94.361)
SWCLK: J1.2 U5.37 | length 100.8
  F.Cu w0.254: U5.37 159.595,95.358 160.63,96.393 165.456,96.393 169.113,92.735 193.599,92.735 196.393,89.941 196.393,71.095 200.812,66.675 200.812,46.05 199.339,44.577 J1.2
SWDIO: J1.1 U5.34 | length 91.7
  F.Cu w0.254: U5.34 162.029,90.015 163.119,88.925 169.215,88.925 172.263,91.973 192.888,91.973 195.682,89.179 195.682,70.536 200.152,66.065 200.152,48.387 198.882,47.117 J1.1
SYS-GPIO0: J5.1 U5.10 | length 70.1
  F.Cu w0.254: v1(148.996,82.017) 148.996,84.092 149.762,84.858 151.419,86.515 U5.10 ; v1(149.454,79.578) 182.575,79.578 184.048,78.105 184.048,58.395 185.674,56.769 J5.1
  B.Cu w0.254: v1(148.996,82.017) 148.996,80.035 v1(149.454,79.578)
SYS-GPIO1: J5.2 U5.11 | length 71.2
  F.Cu w0.254: v1(149.708,82.728) 149.708,84.161 150.007,84.461 150.794,85.248 151.561,86.015 U5.11 ; v1(151.337,78.871) 151.392,78.816 182.27,78.816 183.236,77.851 183.236,54.839 183.845,54.229 J5.2
  B.Cu w0.254: v1(149.708,82.728) 149.708,80.501 v1(151.337,78.871)
SYS-GPIO2: J5.3 U5.12 | length 71.3
  F.Cu w0.254: v1(150.419,83.388) 150.419,84.15 151.784,85.515 U5.12 ; v1(153.924,78.121) 153.94,78.105 181.102,78.105 182.27,76.937 182.27,52.553 183.134,51.689 J5.3
  B.Cu w0.254: v1(150.419,83.388) 150.419,80.747 153.044,78.121 v1(153.924,78.121)
unconnected-(T1-Pad2): T1.2
unconnected-(T2-Pad2): T2.2
unconnected-(U1-Pad1): U1.1
unconnected-(U1-Pad4): U1.4
unconnected-(U1-Pad5): U1.5
unconnected-(U2-Pad1): U2.1
unconnected-(U2-Pad4): U2.4
unconnected-(U2-Pad5): U2.5
unconnected-(U5-Pad2): U5.2
unconnected-(U5-Pad3): U5.3
unconnected-(U5-Pad4): U5.4
unconnected-(U5-Pad5): U5.5
unconnected-(U5-Pad6): U5.6
unconnected-(U5-Pad13): U5.13
unconnected-(U5-Pad14): U5.14
unconnected-(U5-Pad15): U5.15
unconnected-(U5-Pad16): U5.16
unconnected-(U5-Pad17): U5.17
unconnected-(U5-Pad21): U5.21
unconnected-(U5-Pad22): U5.22
unconnected-(U5-Pad25): U5.25
unconnected-(U5-Pad26): U5.26
unconnected-(U5-Pad27): U5.27
unconnected-(U5-Pad28): U5.28
unconnected-(U5-Pad29): U5.29
unconnected-(U5-Pad30): U5.30
unconnected-(U5-Pad31): U5.31
unconnected-(U5-Pad32): U5.32
unconnected-(U5-Pad33): U5.33
unconnected-(U5-Pad38): U5.38
unconnected-(U5-Pad40): U5.40
unconnected-(U5-Pad41): U5.41
unconnected-(U5-Pad42): U5.42
unconnected-(U5-Pad43): U5.43
pads on no net: H5.1 H6.1 H7.1 H8.1 H9.1 H10.1 H11.1 H12.1 H13.1 H14.1 H15.1 H16.1 H17.1 H18.1 H19.1 H20.1 H21.1 H22.1 H23.1 H24.1 U1.Un1 U1.Un2 U1.Un3 U1.Un4 U2.Un1 U2.Un2 U2.Un3 U2.Un4

## Polygon pours and split planes (outlines as drawn)
+3V3 on F.Cu "F.Cu-+3V3-2" (solid, remove dead copper, pour order 10): 182.016,25.578 184.658,25.578 184.658,24.968 182.016,24.968 182.016,24.816 179.934,24.816 179.934,26.695 182.016,26.695
Net-(C4-Pad2) on F.Cu "F.Cu-Net-(C4-Pad2)" (solid, remove dead copper, pour order 9): 192.989,24.816 187.604,24.816 187.604,25.578 190.043,25.578 190.043,25.781 192.024,25.781 192.024,27.305 192.989,27.305
+3V3 on F.Cu "F.Cu-+3V3-1" (solid, remove dead copper, pour order 8): 120.65,77.673 116.129,77.673 116.129,79.756 118.237,79.756 118.237,78.486 118.745,78.486 120.65,78.486
GND on F.Cu "F.Cu-GND-3" (solid, remove dead copper, pour order 7): 203.81,99.797 203.86,7.341 202.336,7.341 202.336,98.323 111.354,98.323 111.354,7.341 109.779,7.341 109.83,99.847
GND on F.Cu "F.Cu-GND-2" (solid, remove dead copper, pour order 6): 203.835,5.842 109.779,5.842 109.779,7.341 203.86,7.341
+3V3 on F.Cu "F.Cu-+3V3" (solid, remove dead copper, pour order 5): 193.65,67.843 187.3,67.843 187.3,69.52 193.65,69.52
Net-(R1-Pad2) on F.Cu "F.Cu-Net-(R1-Pad2)" (solid, remove dead copper, pour order 4): 127.254,78.867 126.111,78.867 126.111,79.121 123.698,79.121 123.698,79.756 126.111,79.756 126.111,81.407 127.254,81.407
Net-(R3-Pad2) on F.Cu "F.Cu-Net-(R3-Pad2)" (solid, remove dead copper, pour order 3): 191.186,26.238 190.348,26.238 190.144,26.238 187.579,26.238 187.579,26.873 190.144,26.873 190.144,28.778 191.186,28.778
Net-(C2-Pad2) on F.Cu "F.Cu-Net-(C2-Pad2)" (solid, remove dead copper, pour order 2): 127.381,77.47 126.111,77.47 126.111,77.851 123.698,77.851 123.698,78.359 127.381,78.359
GND on F.Cu "F.Cu-GND-1" (solid, remove dead copper, pour order 1): 193.446,60.122 187.3,60.173 187.3,61.951 193.446,61.951
GND on F.Cu "F.Cu-GND" (solid, remove dead copper, pour order 0): 180.645,30.658 172.923,30.658 172.923,7.341 171.348,7.341 171.348,7.391 171.399,32.182 179.121,32.182 179.121,75.108 134.569,75.108 134.569,32.182 141.021,32.182 141.072,7.341 139.497,7.341 139.497,30.709 133.045,30.709 133.045,76.632 180.645,76.632
GND on In1.Cu "In1.Cu-GND" (solid, remove dead copper, pour order 11): 203.835,5.842 109.855,5.842 109.855,99.822 203.835,99.822
+3V3 on In2.Cu "In2.Cu-+3V3" (solid, remove dead copper, pour order 12): 203.835,5.842 109.855,5.842 109.855,99.822 203.835,99.822

## Keep-outs
In1.Cu:
  region: 183.642,27.661 175.92,27.661 175.92,7.341 172.923,7.341 172.923,30.658 180.645,30.658 180.645,76.632 133.045,76.632 133.045,30.709 139.497,30.709 139.497,7.341 136.5,7.341 136.5,27.711 129.997,27.711 130.048,79.629 183.642,79.629
In2.Cu:
  region: 183.642,27.661 175.92,27.661 175.92,7.341 172.923,7.341 172.923,30.658 180.645,30.658 180.645,76.632 133.045,76.632 133.045,30.709 139.497,30.709 139.497,7.341 136.5,7.341 136.5,27.711 129.997,27.711 130.048,79.629 183.642,79.629
Edge.Cuts:
  lines w0.1: 109.855,5.842 203.835,5.842 ; 109.855,5.842 109.855,99.822 ; 109.855,5.842 203.835,5.842 ; 109.855,5.842 109.855,99.822 ; 109.855,99.822 203.835,99.822 ; 109.855,99.822 203.835,99.822 ; 203.835,5.842 203.835,99.822 ; 203.835,5.842 203.835,99.822

## Silkscreen, mask and mechanical layers (free items; w line width, h text height)
F.SilkS:
  lines w0.15: 123.952,83.185 132.842,83.185 ; 180.975,20.701 189.992,20.701 ; 189.357,96.266 201.803,96.266 ; 145.542,15.494 154.432,15.494 154.432,29.083 145.542,29.083 145.542,15.494 ; 159.258,15.494 168.148,15.494 168.148,29.083 159.258,29.083 159.258,15.494
  text "ANTT-DBD-RevA" at 193.748,96.744 h1
  text "BW-" at 117.02,95.845 h1.5
  text "Jacob Lambert / Sean Tedesco" at 188.976,93.913 h1
  text "BW+" at 116.161,87.717 h1.5
  text "DISARM" at 123.571,83.775 h1.5
  text "." at 119.693,82.227 h1.5
  text "DEPLOY" at 114.11,72.218 h1.5
  text "GND" at 116.743,69.551 h1.5
  text "3V3" at 185.539,68.422 h1
  text "SDA" at 185.506,65.883 h1
  text "SCK" at 185.536,63.343 h1
  text "GND" at 185.44,60.803 h1
  text "GPIO-0" at 183.596,56.483 h1
  text "GPIO-1" at 183.638,53.818 h1
  text "GPIO-2" at 183.602,51.405 h1
  text "SWDIO" at 184.265,46.706 h1
  text "SWCLK" at 184.14,44.293 h1
  text "NRST" at 184.752,41.753 h1
  text "DEPLOY" at 193.485,34.88 h1.5
  text "GND" at 192.054,32.34 h1.5
  text "." at 183.447,29.522 h1.5
  text "DISARM" at 180.594,21.164 h1.5
  text "COAX1 -" at 153.207,19.623 h1.5 r90
  text "COAX2 -" at 166.923,19.623 h1.5 r90
  text "COAX1 +" at 147.619,19.399 h1.5 r90
  text "COAX2 +" at 161.335,19.399 h1.5 r90
  text "BW+" at 195.536,16.978 h1.5
  text "3V3" at 128.448,11.003 h1.5
  text "BW-" at 195.506,8.977 h1.5
  text "GND" at 128.3,8.591 h1.5
F.Mask:
  region: 140.97,30.734 133.096,30.734 133.096,32.131 140.97,32.131
  region: 172.847,5.842 171.45,5.842 171.45,32.131 172.847,32.131
  region: 180.594,75.184 133.096,75.184 133.096,76.581 180.594,76.581
  region: 140.97,5.842 139.573,5.842 139.573,32.131 140.97,32.131
  region: 111.252,5.842 109.855,5.842 109.855,99.822 111.252,99.822
  region: 203.835,98.425 109.855,98.425 109.855,99.822 203.835,99.822
  region: 203.835,5.842 109.855,5.842 109.855,7.239 203.835,7.239
  region: 180.594,30.734 179.197,30.734 179.197,76.581 180.594,76.581
  region: 180.594,30.734 171.45,30.734 171.45,32.131 180.594,32.131
  region: 203.835,5.842 202.438,5.842 202.438,99.822 203.835,99.822
  region: 134.493,30.734 133.096,30.734 133.096,76.581 134.493,76.581

## Dimensions
113.284,89.789 to 113.284,99.822 on User.2
172.923,7.341 to 175.92,7.341 on User.2
109.855,100.33 to 203.835,100.33 on User.2
194.31,5.842 to 194.31,7.874 on User.2
201.803,12.319 to 203.835,12.319 on User.2
200.66,15.875 to 200.66,5.842 on User.2
109.855,99.822 to 109.855,5.842 on User.2
109.855,96.393 to 119.888,96.393 on User.2
203.835,8.509 to 193.802,8.509 on User.2
115.443,99.822 to 115.443,97.79 on User.2
111.887,93.345 to 109.855,93.345 on User.2
109.347,100.33 to 138.176,100.33 on User.1
204.343,5.334 to 183.134,5.334 on User.1
109.347,5.334 to 109.347,9.779 on User.1
109.347,5.334 to 109.347,20.32 on User.1
204.343,100.33 to 204.343,72.771 on User.1
109.347,100.33 to 113.665,100.33 on User.1
109.347,100.33 to 130.556,100.33 on User.1
109.347,100.33 to 132.08,100.33 on User.1
204.343,5.334 to 144.272,5.334 on User.1
109.347,100.33 to 109.347,77.597 on User.1
109.347,100.33 to 109.347,79.121 on User.1
109.347,5.334 to 109.347,32.893 on User.1
204.343,5.334 to 204.343,40.386 on User.1
204.343,5.334 to 204.343,34.163 on User.1
204.343,5.334 to 204.343,26.543 on User.1
204.343,5.334 to 156.845,5.334 on User.1
204.343,5.334 to 200.025,5.334 on User.1
204.343,5.334 to 204.343,9.652 on User.1
204.343,100.33 to 204.343,85.344 on User.1
109.347,5.334 to 136.906,5.334 on User.1
109.347,5.334 to 124.333,5.334 on User.1
204.343,5.334 to 175.514,5.334 on User.1
204.343,5.334 to 204.343,28.067 on User.1
113.792,4.826 to 109.347,4.826 on User.1
204.343,100.33 to 189.357,100.33 on User.1
204.343,100.33 to 176.784,100.33 on User.1
109.347,100.33 to 109.347,96.012 on User.1
204.343,100.33 to 199.898,100.33 on User.1
204.343,100.33 to 204.343,95.885 on User.1
204.343,42.799 to 169.291,42.799 on User.1
204.343,5.334 to 204.343,52.832 on User.1
204.343,5.334 to 181.61,5.334 on User.1
204.343,5.334 to 204.343,65.405 on User.1
109.347,100.33 to 109.347,71.501 on User.1

## Text inside footprints (layer, text, board x,y; h text height)
T1: F.SilkS "*" at 156.937,46.106 h1 r90; Cmts.User "Copyright 2021 Accelerated Designs. All rights reserved." at 156.868,45.367 h0.13 r90; Cmts.User "0.028in/0.711mm" at 158.375,39.234 h1 r90; F.Fab "0.035in/0.889mm" at 153.346,45.965 h1 r90; F.Fab "0.05in/1.27mm" at 157.74,49.316 h1 r90; F.Fab "0.145in/3.683mm" at 161.499,44.123 h1 r90; F.Fab "*" at 156.937,46.106 h1 r90
T2: F.SilkS "*" at 164.064,52.69 h1; Cmts.User "Copyright 2021 Accelerated Designs. All rights reserved." at 163.324,52.758 h0.13; F.Fab "0.035in/0.889mm" at 160.239,48.762 h1; F.Fab "0.028in/0.711mm" at 166.97,53.791 h1; F.Fab "0.05in/1.27mm" at 157.495,53.156 h1; F.Fab "*" at 164.064,52.69 h1; F.Fab "0.145in/3.683mm" at 162.081,56.915 h1